# Altium PCB Combined.PcbDoc
Units mil, origin at the board's own origin, x right, y up, seen from the top; angles counter-clockwise.
Board outline 3937.01 x 3897.64 mil, 2 copper layers (Top Layer, Bottom Layer); 81 components, 26 nets, 218 pads, 48 vias.
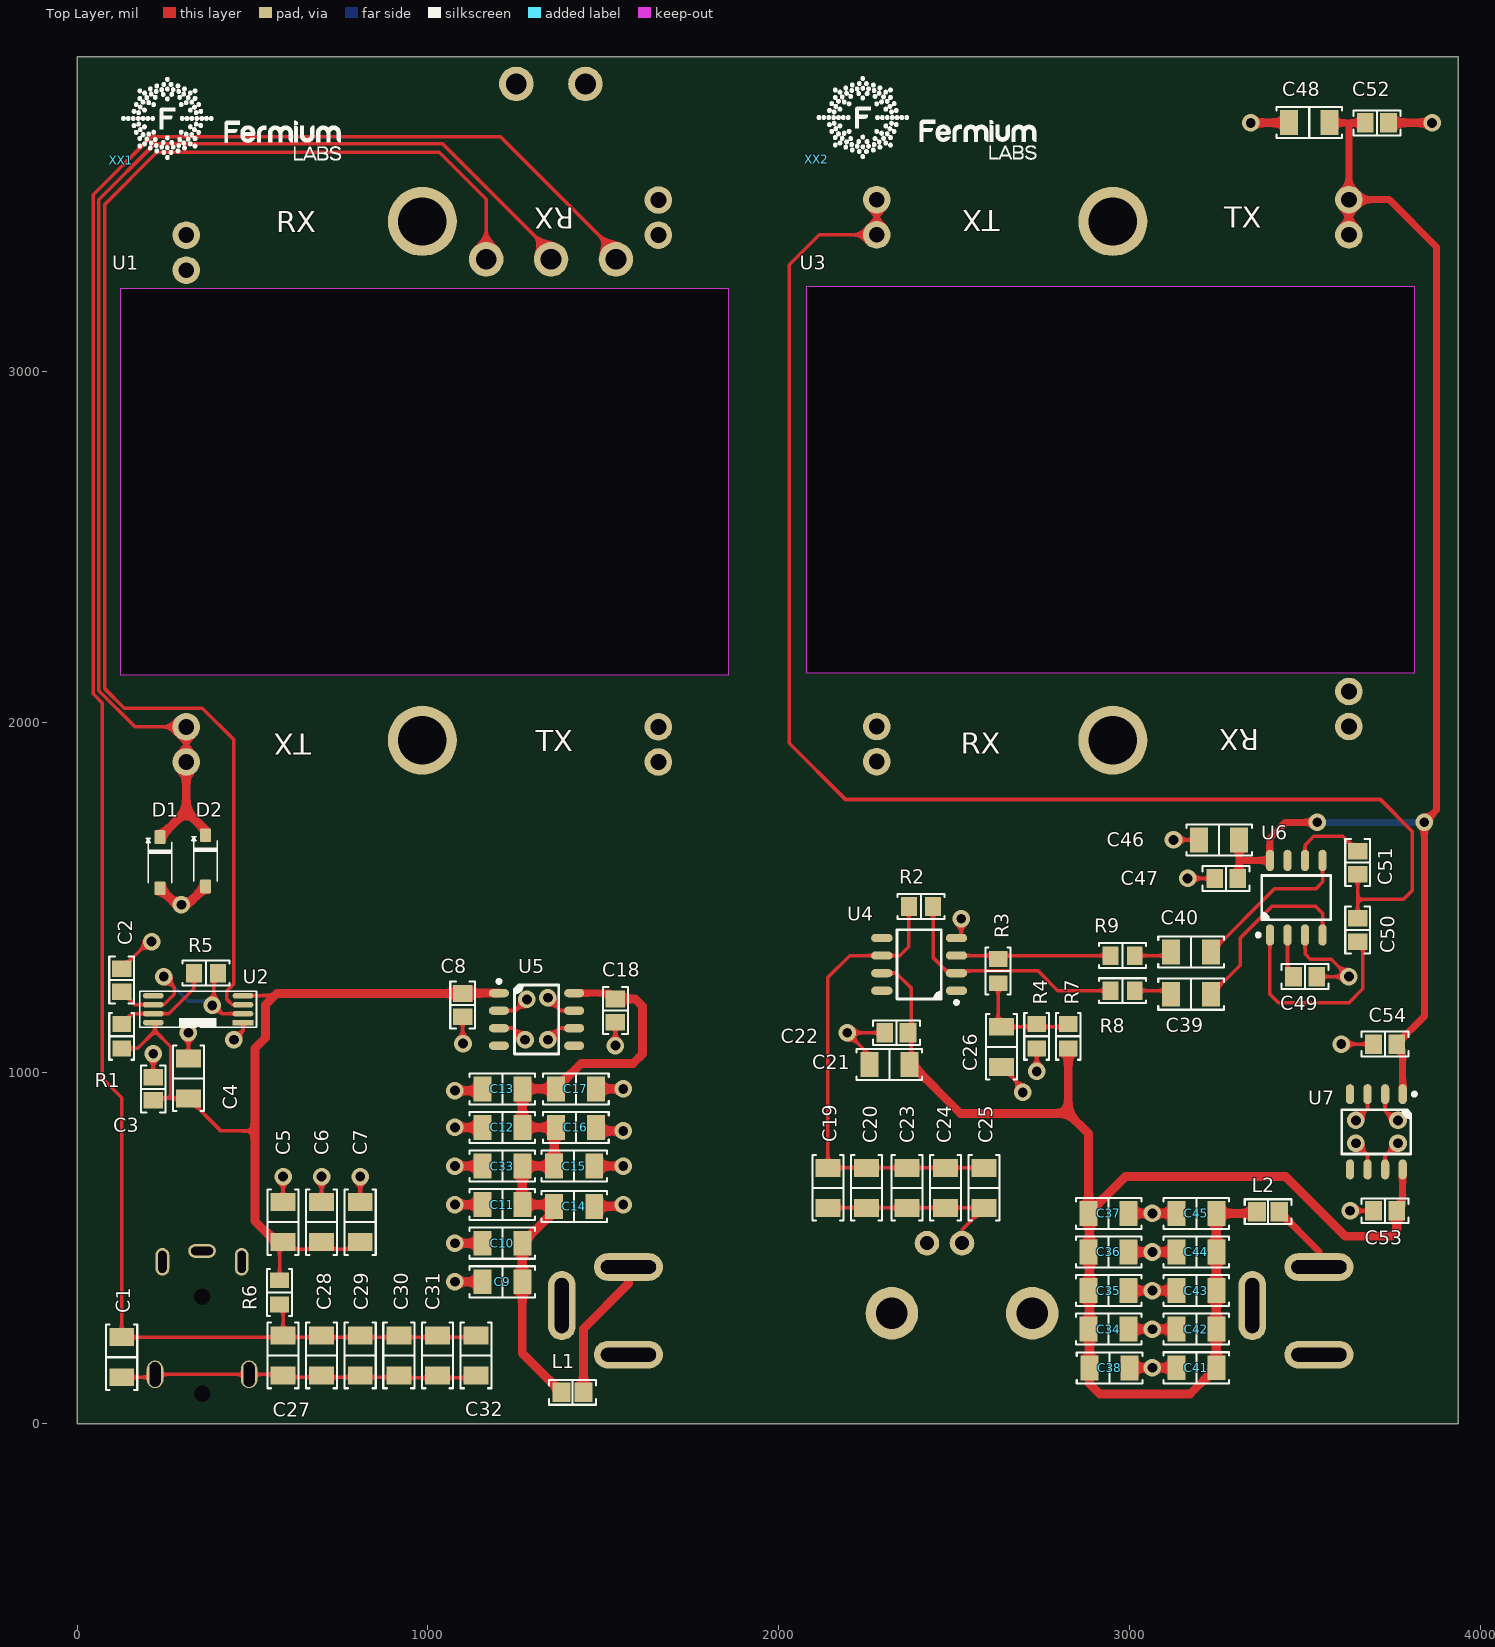
[diagram p0: Top Layer view]
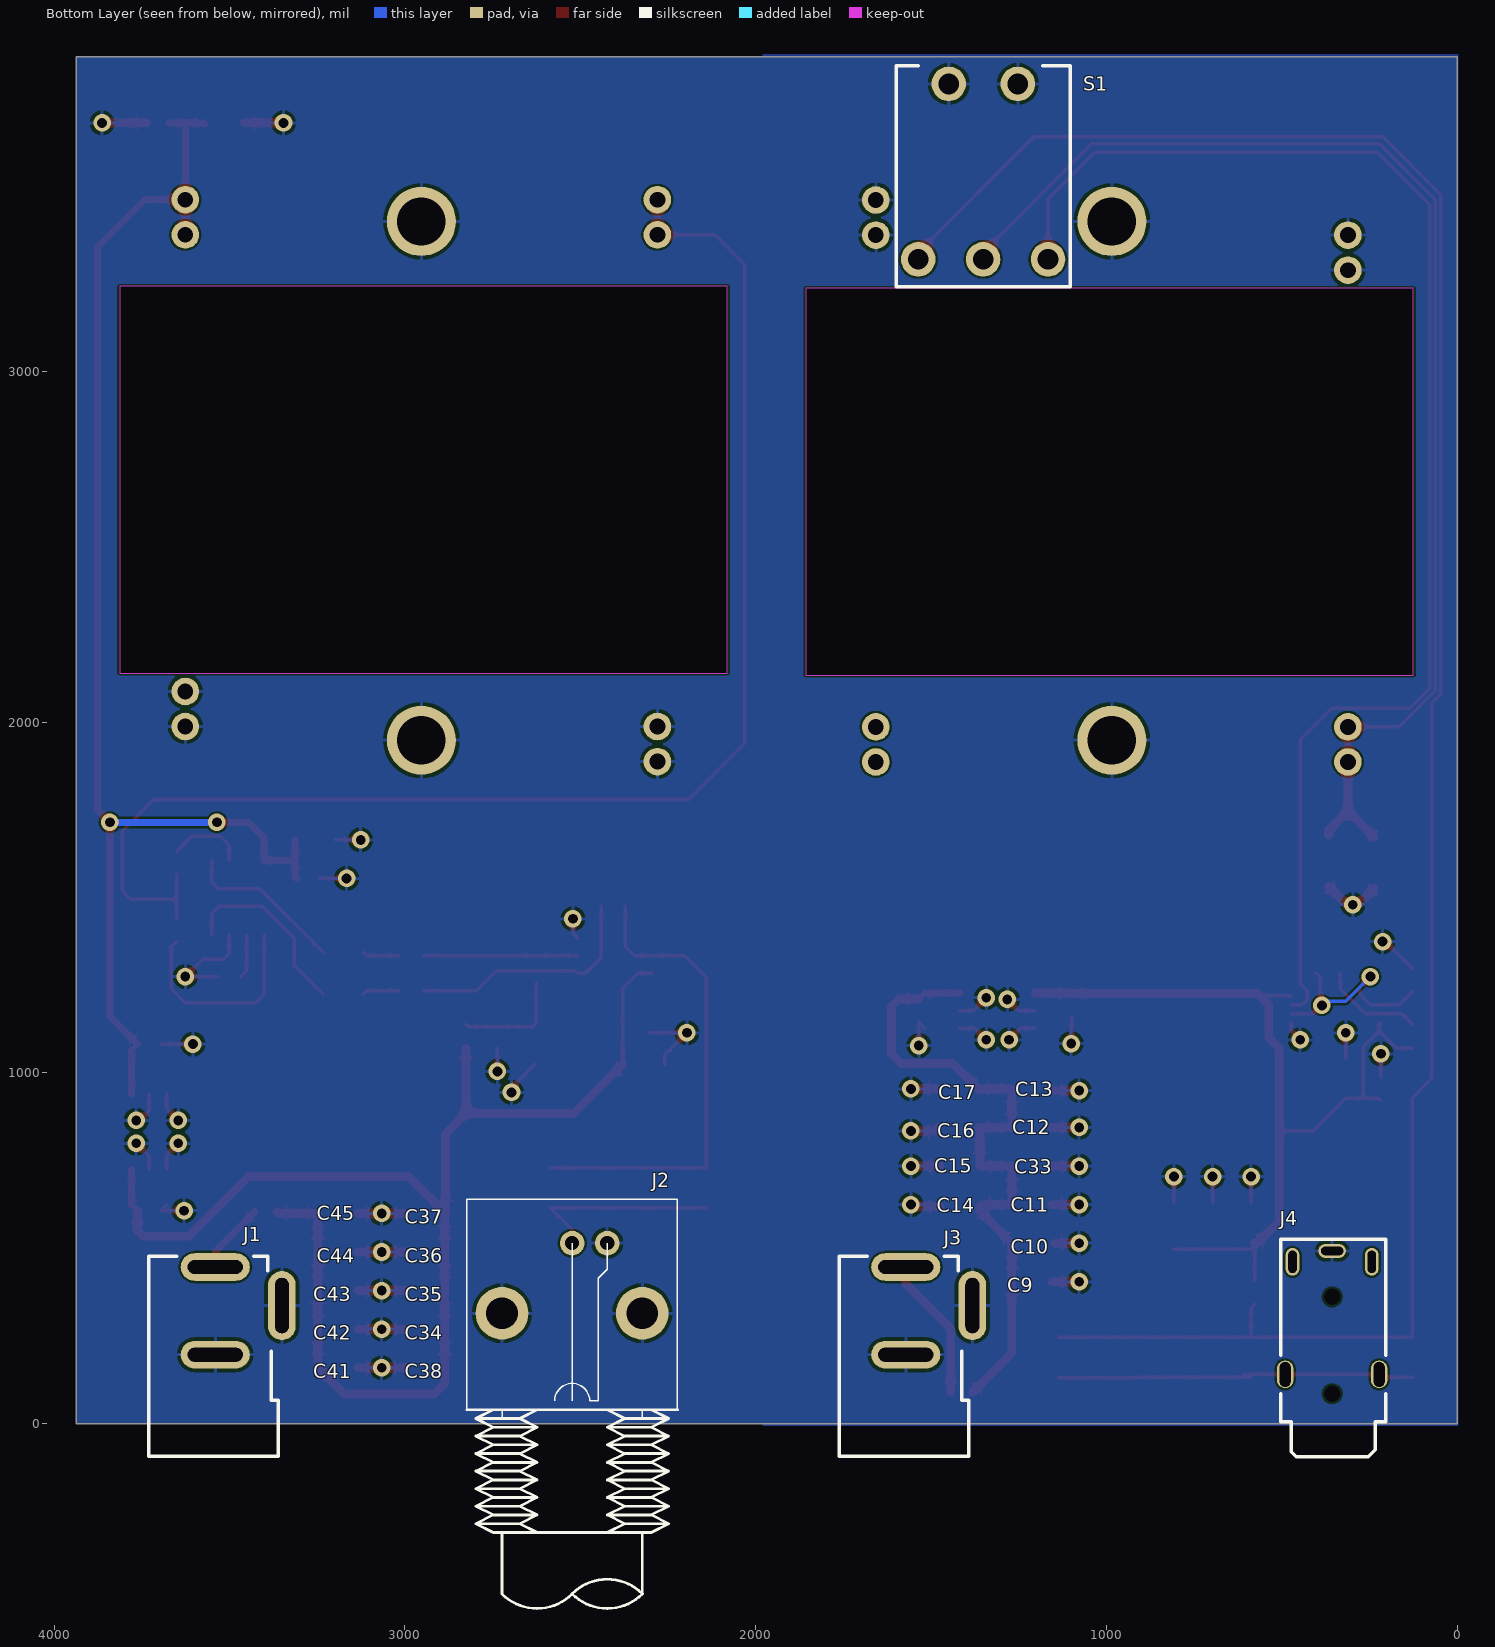
[diagram p1: Bottom Layer view, seen from below]
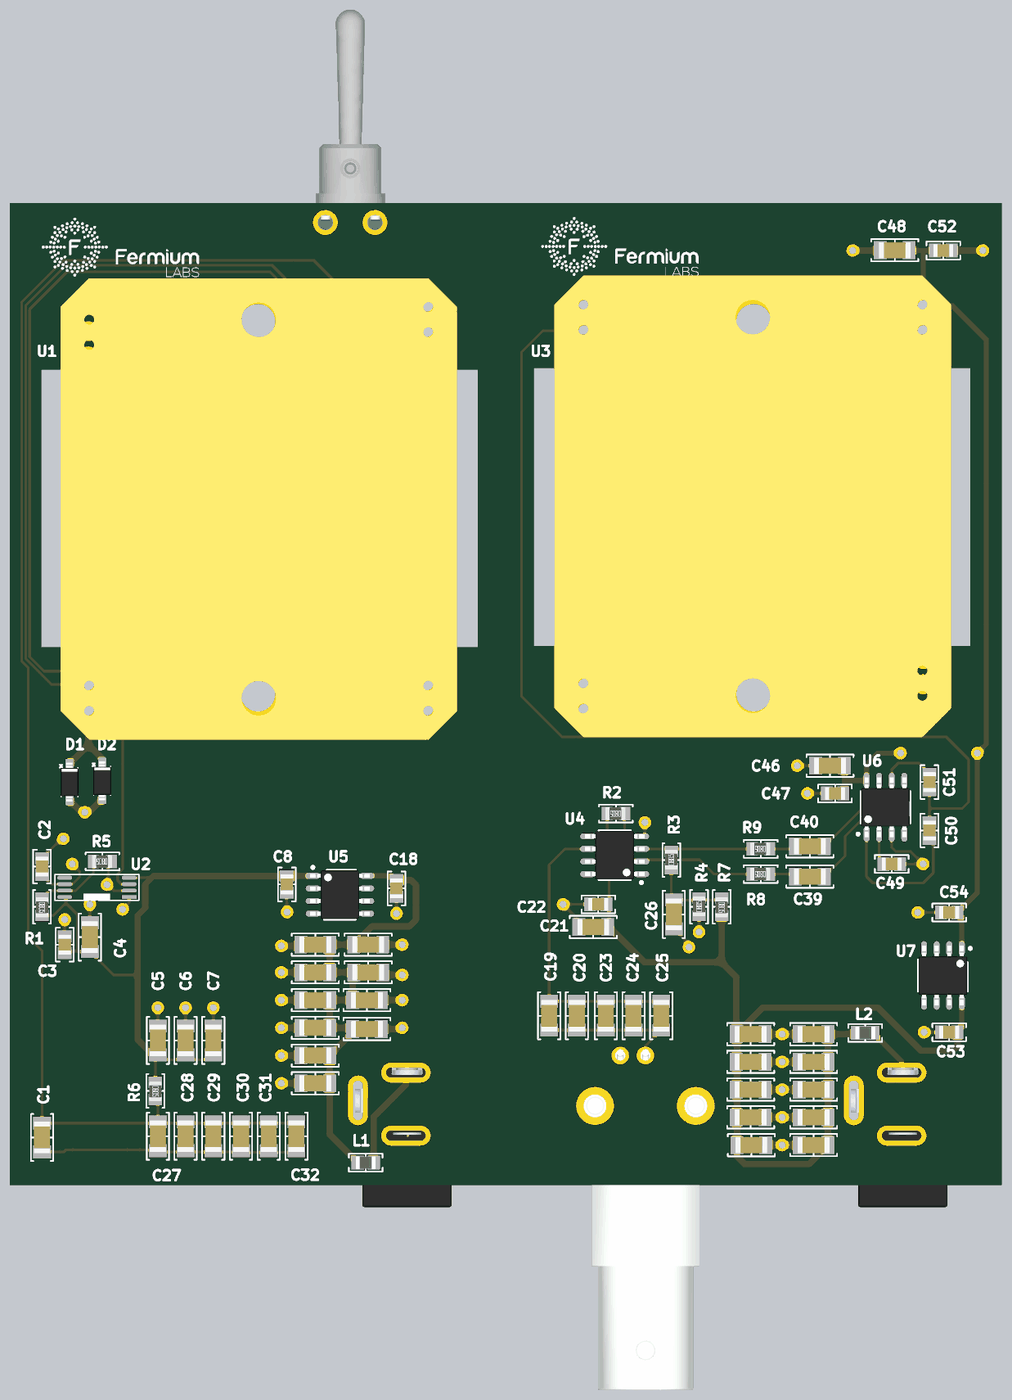
[diagram p2: 3D render of the assembled board from above, using the file's embedded part models]
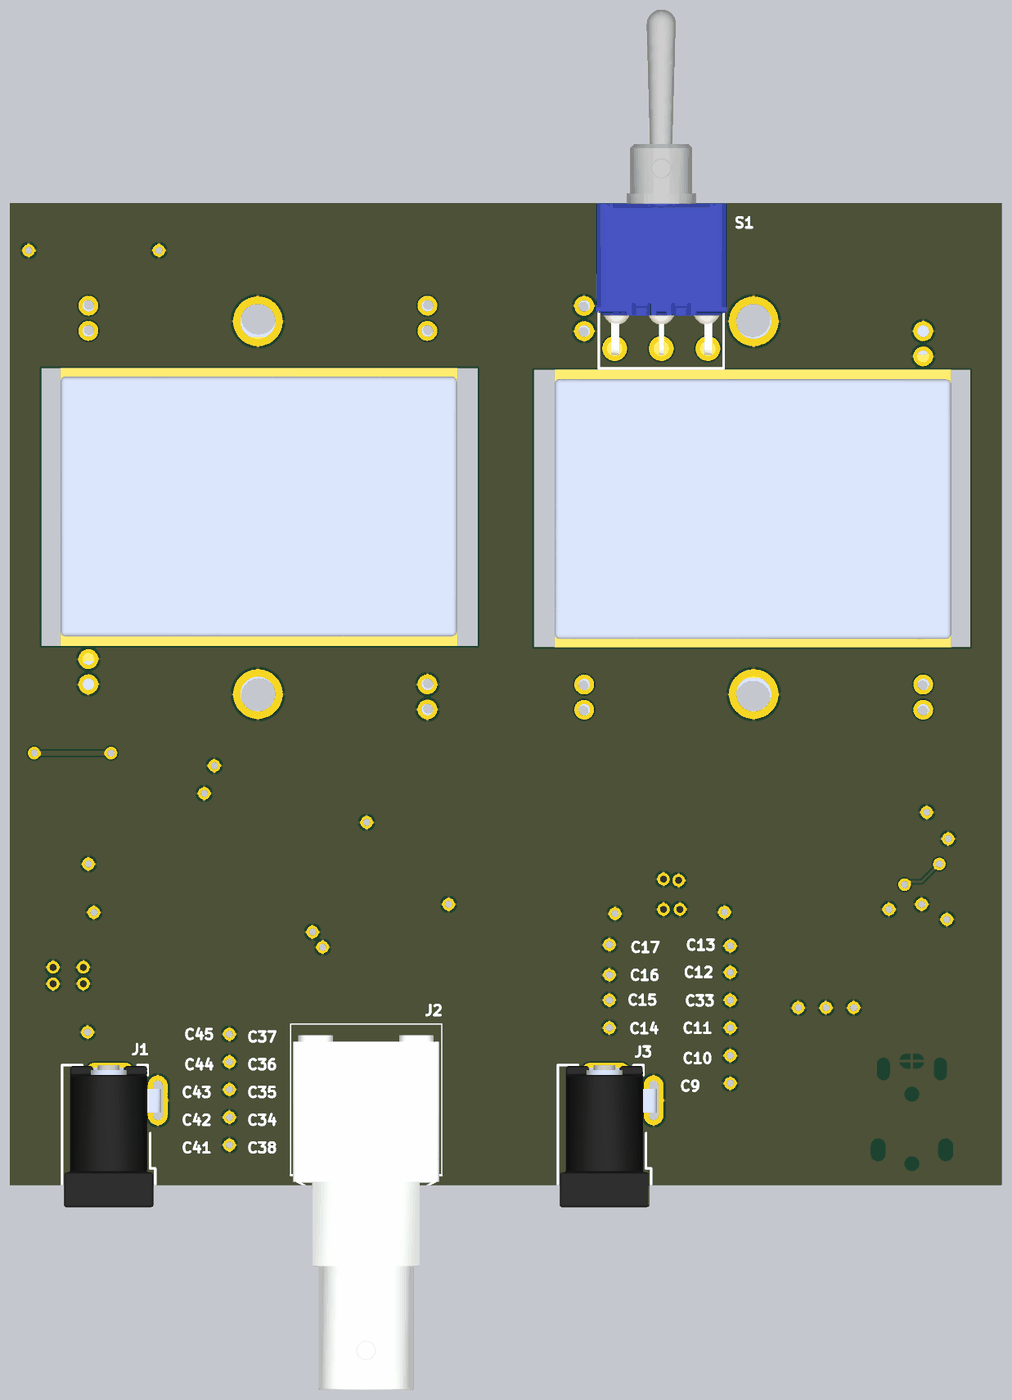
[diagram p3: 3D render of the assembled board from below, using the file's embedded part models]

## Layer stack, top to bottom
Top Solder: solder mask 0.4, Solder Resist, Dk 3.5
Top Layer: signal copper 1.4
Dielectric 1: dielectric 12.6, FR-4, Dk 4.8
Bottom Layer: signal copper 1.4
Bottom Solder: solder mask 0.4, Solder Resist, Dk 3.5

## Board outline
0,0 0,3897.64 1968.5,3897.64 3937.01,3897.64 3937.01,0 1968.5,0

## Design rules (kind name [scope] priority, off if disabled: settings)
AssemblyTestpoint [All] p1: testpointundercomponent=TRUE minsize=40 maxsize=100 preferedsize=60 minholesize=0 maxholesize=40 preferedholesize=32 testpointgrid=100 usegrid=TRUE gridoriginx=2677.17 gridoriginy=1889.76 gridtolerance=0.01 allowsidetop=TRUE allowsidebottom=TRUE
Clearance [All] p1: gap=6 ignorepadtopadclearanceinfootprint=FALSE
FanoutControl Fanout_LCC [All] p1 off: bgadir=Out bgaviamode=Centered fanoutstyle=Auto fanoutdirection=Alternating viagrid=1 // Protel DXP Scope 1 Expression Was: IsLCC   Fanout_LCC (Default Rule)
FanoutControl Fanout_BGA [All] p2 off: bgadir=Out bgaviamode=Centered fanoutstyle=Auto fanoutdirection=Alternating viagrid=1 // Protel DXP Scope 1 Expression Was: IsBGA   Fanout_BGA (Default Rule)
FanoutControl Fanout_SOIC [All] p3 off: bgadir=Out bgaviamode=Centered fanoutstyle=Auto fanoutdirection=Alternating viagrid=1 // Protel DXP Scope 1 Expression Was: IsSOIC   Fanout_SOIC (Default Rule)
FanoutControl Fanout_Default [All] p4: bgadir=Out bgaviamode=Centered fanoutstyle=Auto fanoutdirection=Alternating viagrid=1 // Fanout_Default (Default Rule)
FanoutControl Fanout_Small [All] p5 off: bgadir=Out bgaviamode=Centered fanoutstyle=Auto fanoutdirection=Alternating viagrid=1 // Protel DXP Scope 1 Expression Was: (CompPinCount < 5)   Fanout_Small (Default Rule)
HoleSize [All] p1: absolutevalues=TRUE maxlimit=99999 minlimit=11.81 maxpercent=80.000 minpercent=20.000
MinimumSolderMaskSliver [All] p1 off: minsoldermaskwidth=10
PolygonConnect [All] p1: connectstyle=Relief reliefconductorwidth=10 reliefentries=4 polygonreliefangle="90 Angle" airgapwidth=10
RoutingVias [All] p1: holewidth=28 width=50 viastyle="Through Hole" minholewidth=28 minwidth=50 maxholewidth=28 maxwidth=50
SilkToSilkClearance [All] p1: silktosilkclearance=7.87
SilkToSolderMaskClearance [All] p1 off: minsilkscreentomaskgap=10 clearancetoexposedcopper=TRUE // Protel DXP Scope 1 Expression Was: IsPad
SolderMaskExpansion [All] p1: expansion=2
Width [All] p1: maxlimit=200 minlimit=6 preferedwidth=10
20 further rules are at their usual default settings.

## Classes and differential pairs
component class transmitter: C1 C2 C3 C4 C5 C6 C7 C8 C9 C10 C11 C12 C13 C14 C15 C16 C17 C18 C27 C28 C29 C30 C31 C32 C33 D1 D2 J3 J4 L1 R1 R5 R6 S1 U1 U2 U5 XX2
component class receiver: C19 C20 C21 C22 C23 C24 C25 C26 C34 C35 C36 C37 C38 C39 C40 C41 C42 C43 C44 C45 C46 C47 C48 C49 C50 C51 C52 C53 C54 J1 J2 L2 M1R R2 R3 R4 R7 R8 R9 U3 U4 U6 U7 XX1

## Components (designator, comment, footprint, x,y, rotation, side; value= is the part's Value field where it differs from the comment)
C1 "10uF 25V 1206" "CAP 1206_3216" 127.24,189.65 r270 top (schematic designator C17T)
C2 "100nF 0805" "CAP 0805_2012" 127.24,1264.65 r90 top (schematic designator C22T)
C3 "100nF 0805" "CAP 0805_2012" 217.24,954.65 r90 top (schematic designator C25T)
C4 "10uF 25V 1206" "CAP 1206_3216" 317.24,984.65 r90 top (schematic designator C24T)
C5 "10uF 25V 1206" "CAP 1206_3216" 587.24,574.65 r90 top (schematic designator C15T)
C6 "10uF 25V 1206" "CAP 1206_3216" 697.24,574.65 r90 top (schematic designator C14T)
C7 "10uF 25V 1206" "CAP 1206_3216" 807.24,574.65 r90 top (schematic designator C13T)
C8 "100nF 0805" "CAP 0805_2012" 1099.24,1193.65 r270 top (schematic designator C2T)
C9 "10uF 25V 1206" "CAP 1206_3216" 1212.24,404.65 r180 top (schematic designator C10T)
C10 "10uF 25V 1206" "CAP 1206_3216" 1212.24,514.65 r180 top (schematic designator C9T)
C11 "10uF 25V 1206" "CAP 1206_3216" 1212.24,624.65 r180 top (schematic designator C8T)
C12 "10uF 25V 1206" "CAP 1206_3216" 1212.24,844.65 r180 top (schematic designator C6T)
C13 "10uF 25V 1206" "CAP 1206_3216" 1212.24,954.65 r180 top (schematic designator C5T)
C14 "10uF 25V 1206" "CAP 1206_3216" 1417.24,619.65 r0 top (schematic designator C12T)
C15 "10uF 25V 1206" "CAP 1206_3216" 1417.24,734.65 r0 top (schematic designator C11T)
C16 "10uF 25V 1206" "CAP 1206_3216" 1422.24,844.65 r0 top (schematic designator C4T)
C17 "10uF 25V 1206" "CAP 1206_3216" 1422.24,954.65 r0 top (schematic designator C3T)
C18 "100nF 0805" "CAP 0805_2012" 1534.57,1177.91 r270 top (schematic designator C1T)
C19 "10uF 25V 1206" "CAP 1206_3216" 2140.75,672.56 r270 top (schematic designator C13R)
C20 "10uF 25V 1206" "CAP 1206_3216" 2250.75,672.56 r270 top (schematic designator C17R)
C21 "10uF 25V 1206" "CAP 1206_3216" 2315.75,1024.65 r180 top (schematic designator C28R)
C22 "100nF 0805" "CAP 0805_2012" 2335.75,1114.65 r180 top (schematic designator C29R)
C23 "10uF 25V 1206" "CAP 1206_3216" 2365.75,672.56 r270 top (schematic designator C14R)
C24 "10uF 25V 1206" "CAP 1206_3216" 2475.75,672.56 r270 top (schematic designator C22R)
C25 "10uF 25V 1206" "CAP 1206_3216" 2585.75,672.56 r270 top (schematic designator C20R)
C26 "10uF 25V 1206" "CAP 1206_3216" 2635.75,1074.65 r270 top (schematic designator C23R)
C27 "10uF 25V 1206" "CAP 1206_3216" 587.24,194.65 r270 top (schematic designator C16T)
C28 "10uF 25V 1206" "CAP 1206_3216" 697.24,194.65 r270 top (schematic designator C20T)
C29 "10uF 25V 1206" "CAP 1206_3216" 807.24,194.65 r270 top (schematic designator C19T)
C30 "10uF 25V 1206" "CAP 1206_3216" 917.24,194.65 r270 top (schematic designator C18T)
C31 "10uF 25V 1206" "CAP 1206_3216" 1027.24,194.65 r270 top (schematic designator C21T)
C32 "10uF 25V 1206" "CAP 1206_3216" 1137.24,194.65 r270 top (schematic designator C23T)
C33 "10uF 25V 1206" "CAP 1206_3216" 1212.24,734.65 r180 top (schematic designator C7T)
C34 "10uF 25V 1206" "CAP 1206_3216" 2940.75,269.65 r0 top (schematic designator C4R)
C35 "10uF 25V 1206" "CAP 1206_3216" 2940.75,379.65 r0 top (schematic designator C5R)
C36 "10uF 25V 1206" "CAP 1206_3216" 2940.75,489.65 r0 top (schematic designator C6R)
C37 "10uF 25V 1206" "CAP 1206_3216" 2940.75,599.65 r0 top (schematic designator C7R)
C38 "10uF 25V 1206" "CAP 1206_3216" 2943.39,159.09 r0 top (schematic designator C3R)
C39 "10uF 25V 1206" "CAP 1206_3216" 3175.75,1224.65 r180 top (schematic designator C15R)
C40 "10uF 25V 1206" "CAP 1206_3216" 3175.75,1344.65 r180 top (schematic designator C18R)
C41 "10uF 25V 1206" "CAP 1206_3216" 3190.75,159.65 r180 top (schematic designator C12R)
C42 "10uF 25V 1206" "CAP 1206_3216" 3190.75,269.65 r180 top (schematic designator C11R)
C43 "10uF 25V 1206" "CAP 1206_3216" 3190.75,379.65 r180 top (schematic designator C10R)
C44 "10uF 25V 1206" "CAP 1206_3216" 3190.75,489.65 r180 top (schematic designator C9R)
C45 "10uF 25V 1206" "CAP 1206_3216" 3190.75,599.65 r180 top (schematic designator C8R)
C46 "10uF 25V 1206" "CAP 1206_3216" 3255.75,1664.65 r180 top (schematic designator C26R)
C47 "100nF 0805" "CAP 0805_2012" 3275.75,1554.65 r180 top (schematic designator C27R)
C48 "10uF 25V 1206" "CAP 1206_3216" 3512.75,3709.65 r180 top (schematic designator C24R)
C49 "100nF 0805" "CAP 0805_2012" 3500.75,1274.65 r0 top (schematic designator C21R)
C50 "1nF 0805" "CAP 0805_2012" 3650.75,1407.65 r270 top (schematic designator C16R)
C51 "1nF 0805" "CAP 0805_2012" 3650.75,1599.65 r90 top (schematic designator C19R)
C52 "100nF 0805" "CAP 0805_2012" 3705.75,3708.65 r0 top (schematic designator C25R)
C53 "100nF 0805" "CAP 0805_2012" 3729.02,607.32 r180 top (schematic designator C1R)
C54 "100nF 0805" "CAP 0805_2012" 3729.02,1082.32 r180 top (schematic designator C2R)
D1 "5.6V" SOD123 236.24,1599.65 r270 top (schematic designator D1T)
D2 "MBR0520L" SOD123 366.24,1604.65 r270 top (schematic designator D2T)
J1 "DC-10A FC68148" dc-jack 3540.31,446.85 r270 bottom (schematic designator J1R)
J2 "1-1337543-0" BNC-RA 2722.83,314.96 r0 bottom (schematic designator J2R)
J3 "DC-10A FC68148" dc-jack 1571.8,446.85 r270 bottom (schematic designator J1T)
J4 "FC68125" FC68125 -196.76,-854.35 r90 bottom (schematic designator J2T)
L1 "BLM21AG102SN1D" "FER 0805_2012" 1412.24,89.65 r180 top (schematic designator L1T)
L2 "BLM21AG102SN1D" "FER 0805_2012" 3395.75,604.65 r180 top (schematic designator L1R)
R1 "1K 0805" "RES 0805_2012" 127.24,1104.65 r270 top (schematic designator R2T)
R2 "220K 0805" "RES 0805_2012" 2405.75,1474.65 r180 top (schematic designator R1R)
R3 "220K 0805" "RES 0805_2012" 2625.75,1290.2 r90 top (schematic designator R5R)
R4 "1K 0805" "RES 0805_2012" 2735.75,1104.65 r90 top (schematic designator R6R)
R5 "10K 0805" "RES 0805_2012" 367.24,1284.65 r180 top (schematic designator R3T)
R6 "33R 0805" "RES 0805_2012" 577.24,374.65 r270 top (schematic designator R1T)
R7 "1K 0805" "RES 0805_2012" 2825.75,1104.65 r270 top (schematic designator R4R)
R8 "10K 0805" "RES 0805_2012" 2980.75,1234.65 r180 top (schematic designator R2R)
R9 "10K 0805" "RES 0805_2012" 2980.75,1334.65 r180 top (schematic designator R3R)
S1 "TSM102C3" TSM102C3 1536.24,3319.65 r180 bottom (schematic designator S1T)
U1 "HB100" HB100-buried 1657.24,1886.65 r90 top (schematic designator U2T)
U2 "NE555PWR" TSSOP8 473.15,1143.46 r180 top (schematic designator U3T)
U3 "HB100" HB100-buried 2279.75,3489.65 r270 top (schematic designator U4R)
U4 "LF356M/NOPB" "TI SOIC-8 D" 2400.75,1309.65 r180 top (schematic designator U3R)
U5 "L78L06ACD" "ST SOIC-8N" 1309.96,1152.65 r0 top (schematic designator U1T)
U6 "SA612A" "TI SOIC-8 D" 3475.75,1499.65 r90 top (schematic designator U2R)
U7 "L78L05ACD" "ST SOIC-8N" 3704.02,832.32 r270 top (schematic designator U1R)
XX1 "FermiumLABS Logo" frm-med 125.62,3602.12 r0 top (schematic designator XX1R)
XX2 "FermiumLABS Logo" frm-med 2108.19,3604.65 r0 top (schematic designator XX1T)

## Footprints (in the part's own frame and the unit in brackets; to place one, negate y for a bottom-side part, rotate by r counter-clockwise, add the part's x,y. Pads: shape width x height; smd on the part's side, far side on the other; paste and mask are expansions set on the pad)
BNC-RA [mil]
  round 70 hole 40: 1(-200,-200) 2(-300,-200)
  round 150 hole 90: A(0,0) B(-400,0)
  silkscreen extent -500,-325 100,842, body extent -490,-280 91,1127, height 619
"CAP 0805_2012" [mm]
  rect 1.2x1.4 smd: 1(-0.838,0) 2(0.838,0)
  silkscreen extent -1.7,-0.9 1.7,0.9, body extent -1,-0.64 1,0.64, height 1.26
"CAP 1206_3216" [mm]
  rect 1.3x1.8 smd: 1(-1.45,0) 2(1.45,0)
  silkscreen extent -2.37,-1.12 2.37,1.12, body extent -1.6,-0.81 1.6,0.81, height 1.62
dc-jack [mm]
  oval 2x5 hole 1 slot 4 at 90 deg: 1(0,0) 3(6.35,0)
  oval 5x2 hole 1 slot 4 at 0 deg: 2(2.794,4.826)
  silkscreen extent -0.76,-4.83 13.72,4.57, body extent -0.76,-4.62 13.54,5.13, height 11.3
FC68125 [mm]
  oval 1x2 hole 0.6 slot 1.6 at 90 deg: 1(34.214,14.046)
  oval 2x1 hole 0.6 slot 1.6 at 0 deg: 2(33.426,16.916) 6(33.426,11.176)
  oval 2x1.2 hole 0.8 slot 1.8 at 0 deg: 3(25.273,10.643) 3(25.273,17.45)
  round 0 hole 1.2: ""(23.876,14.046) ""(30.886,14.046)
  silkscreen extent 19.3,10.16 35.05,17.78, body extent 19.37,10.31 34.47,17.71, height 6.2
"FER 0805_2012" [mm]
  rect 1.3x1.4 smd: 1(-0.8,0) 2(0.8,0)
  silkscreen extent -1.7,-0.9 1.7,0.9, body extent -1,-0.64 1,0.64, height 1.26
frm-med [mil]
  silkscreen extent 1,1 626,237
HB100-buried [mm]
  round 2 hole 1.143: 1(0,34.188) 1(2.54,34.188) 2(0,0) 2(2.54,0) 3(38.151,0) 3(40.691,0) 4(35.611,34.188) 4(38.151,34.188)
  round 5 hole 3.5: 5(1.575,17.094) 5(39.141,17.094)
  Keep-Out Layer board cut-out: 6.286,-5.066 6.286,38.934 34.286,38.934 34.286,-5.066
  body extent -3.02,-3 43.48,37, height 3
"RES 0805_2012" [mm]
  rect 1.15x1.35 smd: 1(-0.875,0) 2(0.875,0)
  silkscreen extent -1.7,-0.9 1.7,0.9, body extent -0.95,-0.62 1.05,0.63, height 0.6
SOD123 [mm]
  round 0.508 on Mech15: 0(0,0)
  rrect25% 1x0.8 smd: A(1.85,0) K(-1.85,0)
  silkscreen extent -1.75,-1 1.45,0.85, body extent -1.95,-0.9 1.95,0.9, height 1.18
"ST SOIC-8N" [mm]
  oval 1.45x0.6 smd: 1(-2.725,1.905) 2(-2.725,0.635) 3(-2.725,-0.635) 4(-2.725,-1.905) 5(2.725,-1.905) 6(2.725,-0.635) 7(2.725,0.635) 8(2.725,1.905)
  silkscreen extent -2.85,-2.5 1.6,2.88, body extent -3.01,-2.45 3.01,2.45, height 1.5
"TI SOIC-8 D" [mm]
  oval 1.55x0.6 smd: 1(-2.7,1.905) 2(-2.7,0.635) 3(-2.7,-0.635) 4(-2.7,-1.905) 5(2.7,-1.905) 6(2.7,-0.635) 7(2.7,0.635) 8(2.7,1.905)
  silkscreen extent -2.83,-2.5 1.6,2.88, body extent -3.01,-2.45 3.01,2.45, height 1.5
TSM102C3 [mm]
  round 2.5 hole 1.5: 1(0,0) 2(4.699,0) 3(9.398,0) G(2.21,12.7) G(7.214,12.7)
  silkscreen extent -1.6,-2 11,14, body extent -1.9,-0.65 11.3,34.15, height 8.47
TSSOP8 [mm]
  rect 1.5x0.4 smd: 1(0,0)
  oval 1.5x0.4 smd: 2(0,-0.65) 3(0,-1.3) 4(0,-1.95) 5(6.5,-1.95) 6(6.5,-1.3) 7(6.5,-0.65) 8(6.5,0)
  silkscreen extent -0.98,-2.28 7.48,0.33, body extent -0.06,-2.26 6.52,0.3, height 1.04

## Part data
C1 C4 C5 C6 C7 C9 C10 C11 C12 C13 C14 C15 C16 C17 C19 C20 C21 C23 C24 C25 C26 C27 C28 C29 C30 C31 C32 C33 C34 C35 C36 C37 C38 C39 C40 C41 C42 C43 C44 C45 C46 C48: library part C10uF, "Capacitor", Manufacturer=SAMSUNG, Manufacturer Part Number=CL31A106KAHNNNE, Part Number=C10uF
C2 C3 C8 C18 C22 C47 C49 C52 C53 C54: library part C100nF, "Capacitor", Manufacturer=YAGEO, Manufacturer Part Number=CC0805JRX7R9BB104, Part Number=C100nF
C50 C51: library part C1nF, "Capacitor", Manufacturer=Samsung, Manufacturer Part Number=CL21B102KCANNNC, Part Number=C1nF
D1: library part "D Zener", "Zener Diode", Manufacturer=Diodes, Manufacturer Part Number=BZT52C5V6-7-F, Part Number="D Zener"
D2: library part "D Schottky", "Schottky Diode", Manufacturer="FAIRCHILD SEMICONDUCTOR", Manufacturer Part Number=MBR0520L, Part Number="D Schottky"
J1 J3: library part jackdc, Manufacturer=CLIFF, Manufacturer Part Number="DC-10A FC68148", Part Number=jackdc
J2: library part BNC-PCB-RA, "connector bnc", Manufacturer="TE CONNECTIVITY", Manufacturer Part Number=1-1337543-0, Part Number=BNC-PCB-RA
J4: Manufacturer=CLIFF, Manufacturer Part Number=FC68125, Part Number=FC68125
L1 L2: library part "Inductor Iron", "Magnetic-Core Inductor", Manufacturer=Murata, Manufacturer Part Number=BLM21AG102SN1D, Part Number="Inductor Iron"
R1 R4 R7: library part R1K, "Resistor", Manufacturer="Royal Electronic Factory", Manufacturer Part Number=0805S8J0102T5E, Part Number=R1K
R2 R3: library part R220K, "Resistor", Manufacturer=Vishay, Manufacturer Part Number=CRCW0805220KFKEA, Part Number=R220K
R5 R8 R9: library part R10K, "Resistor", Manufacturer="Royal Electronic Factory", Manufacturer Part Number=0805S8J0103T5E, Part Number=R10K
R6: library part R33, "Resistor", Manufacturer=Vishay, Manufacturer Part Number=CRCW080533R0JNTABC, Part Number=R33
S1: Manufacturer Part Number=Ninigi, Manufacturer=TSM102C3, Part Number=TSM102C3
U1 U3: Manufacturer="China unspecified", Manufacturer Part Number=HB100, Part Number=HB100
U2: Manufacturer="Texas Instruments", Manufacturer Part Number=NE555PWR, Part Number=NE555PWR
U4: library part LF358, Manufacturer="Texas Instruments", Manufacturer Part Number=LF356M/NOPB, Part Number=LF358
U5 U7: Manufacturer="ST Microelectronics"
  U5: Manufacturer Part Number=L78L06ACD, Part Number=L78L06ACD
  U7: Manufacturer Part Number=L78L05ACD, Part Number=L78L05ACD
U6: Manufacturer=NXP, Manufacturer Part Number=SA612AD, Supplier 1=TME, Supplier 2=Mouser, Supplier Part Number 1=SA612AD, Supplier Part Number 2=771-SA612AD01112
XX1 XX2: library part fermiumlabs-logo, Part Number=fermiumlabs-logo

## Via types
v1: diameter 50, hole 28, Top Layer to Bottom Layer, 48 vias

## Nets (pads, with @x,y where several pads share a name; then routed paths per layer and width w, separated by ;. In a path a pad name is that pad's centre, name@x,y a point inside that pad or via, vN(x,y) a via of type N, cw(c..) or ccw(c..) an arc to the next point about the centre after c; other vN are vias at no path point)
5V: C46.1 C47.1 C48.1 C52.1 C54.1 U3.1 U6.8 U7.1 | length 3913.9
  Top Layer w10: C54.1 C54.1@3779.02,1065.32
  Top Layer w20: C47.1 3312.83,1558.73 3312.83,1604.65 ; C46.1 3312.83,1604.65 ; v1(3535.75,1714.65) 3445.75,1714.65 3400.75,1669.65 U6.8 3314.13,1605.95 3312.83,1604.65 ; C48.1@3569.76,3705.57 3572.83,3708.65 C52.1 ; U3.1@3625.75,3389.65 U3.1@3625.75,3489.65 ; 3625.75,3701.65 U3.1@3625.75,3489.65 ; C54.1 3840.75,1161.06 v1(3840.75,1714.65) 3875.75,1749.65 3875.75,3354.65 3740.75,3489.65 U3.1@3625.75,3489.65 ; U7.1 C54.1@3779.02,1065.32
  Bottom Layer w20: v1(3535.75,1714.65) v1(3840.75,1714.65)
12V: C21.1 C22.1 C34.1 C35.1 C36.1 C37.1 C38.1 C41.1 C42.1 C43.1 C44.1 C45.1 C53.1 L2.2 R7.2 U4.7 U7.8 | length 3948.8
  Top Layer w10: U4.7 2335.75,1284.65 2378.66,1241.73 C21.1@2378.66,1024.65 ; C53.1 C53.1@3779.02,624.32
  Top Layer w20: C53.1@3779.02,624.32 U7.8
  Top Layer w25: C21.1@2378.66,1024.65 2518.66,884.65 2825.75,884.65 ; R7.2 2825.75,884.65 ; L2.2 3359.25,599.65 C45.1 C44.1 C43.1 C42.1 C41.1 3172.83,84.65 2915.75,84.65 2886.3,114.09 C38.1 2886.3,379.65 2886.3,597.01 C37.1 ; C53.1 3762.02,550.91 3745.75,534.65 3615.75,534.65 3445.75,704.65 2988.66,704.65 C37.1 ; 2825.75,884.65 2883.66,826.73 C37.1
GND: C2.2 C3.2 C4.2 C5.2 C6.2 C7.2 C8.2 C9.2 C10.2 C11.2 C12.2 C13.2 C14.2 C15.2 C16.2 C17.2 C18.2 C21.2 C22.2 C26.2 C33.2 C34.2 C35.2 C36.2 C37.2 C38.2 C41.2 C42.2 C43.2 C44.2 C45.2 C46.2 C47.2 C48.2 C49.2 C52.2 C53.2 C54.2 D1.A D2.A J1.2 J1.3 J2.2 J2.A J2.B J3.2 J3.3 J4.1 R4.1 S1.G U1.3 U1.4 U1.5 U2.1 U3.3 U3.4 U3.5 U4.4 U5.2 U5.3 U5.6 U5.7 U6.3 U7.2 U7.3 U7.6 U7.7 | length 4330.7
  Top Layer w10: C2.2 204.24,1374.65 v1(212.24,1374.65) ; C3.2 v1(217.24,1054.65) ; C4.2 v1(317.24,1114.65) ; v1(447.24,1094.65) 473.15,1120.55 U2.1 ; C5.2 v1@587.24,694.65 ; C6.2 v1@697.24,684.65 ; C7.2 v1@807.24,694.65 ; C8.2 1099.24,1084.65 v1(1100.24,1083.65) ; U5.3 1244.24,1127.65 v1(1277.24,1094.65) ; U5.2 1250.24,1177.65 v1(1282.24,1209.65) ; v1(1342.24,1094.65) 1375.24,1127.65 U5.6 ; v1(1342.24,1214.65) 1379.24,1177.65 U5.7 ; C18.2@1517.57,1127.91 C18.2 v1(1534.57,1077.91) ; C21.2 2258.66,1051.73 v1(2195.75,1114.65) C22.2 ; U4.4 2520.75,1398.35 v1(2520.75,1439.65) ; C26.2@2628.66,1024.65 C26.2 2695.75,957.56 v1(2695.75,944.65) ; v1(2735.75,1004.65) R4.1 ; v1(3125.75,1664.65) C46.2 ; v1(3165.75,1554.65) C47.2 ; U6.3 3500.75,1339.65 3515.75,1324.65 3575.75,1324.65 v1(3625.75,1274.65) ; C49.2 v1@3600.75,1274.65 ; v1(3604.02,1082.32) C54.2 ; v1(3629.02,607.32) C53.2 C53.2@3679.02,624.32 ; v1(3645.75,799.65) 3679.02,766.38 U7.6 ; v1(3645.75,864.65) 3679.02,897.91 U7.3 ; U7.7 3729.02,762.91 v1(3765.75,799.65) ; U7.2 3729.02,891.38 3755.75,864.65 v1(3765.75,864.65)
  Top Layer w25: D1.A 283.41,1479.65 v1(297.24,1479.65) 314.08,1479.65 D2.A ; v1(1077.24,404.65) C9.2 ; v1(1077.24,514.65) C10.2@1147.24,514.65 ; v1(1077.24,624.65) C11.2 ; v1(1077.24,734.65) C33.2 ; v1(1077.24,844.65) C12.2 ; v1(1077.24,949.65) 1150.16,949.65 C13.2 ; C14.2 1552.24,619.65 v1(1557.24,624.65) ; C15.2 v1(1557.24,734.65) ; C16.2 1489.33,834.65 v1(1557.24,834.65) ; C17.2 v1(1557.24,954.65) ; J2.A J2.A@2723.15,314.65 ; C38.2@2997.83,161.73 C38.2 3001.02,159.65 v1(3065.75,159.65) C41.2 ; C34.2 v1(3065.75,269.65) C42.2 ; C35.2 v1(3065.75,379.65) C43.2 ; C36.2 v1(3065.75,489.65) C44.2 ; C37.2 v1(3065.75,599.65) C45.2 ; v1(3345.75,3708.65) C48.2@3458.66,3708.65 ; C52.2@3735.75,3708.65 C52.2 v1(3862.75,3708.65)
  other v1: 587.24,704.65 697.24,704.65 807.24,704.65
NetC1_1: C1.1 C27.1 C28.1 C29.1 C30.1 C31.1 C32.1 R6.2 S1.1 | length 6114.4
  Top Layer w10: R6.2 587.24,330.2 C27.1 C27.1@587.24,246.73 ; C32.1@1137.24,244.65 1135.16,246.73 C27.1@587.24,246.73 ; S1.1 1536.24,3339.65 1206.24,3669.65 212.24,3669.65 46.24,3503.65 46.24,2080.65 72.24,2054.65 72.24,984.65 127.24,929.65 C1.1 C27.1@587.24,246.73
NetC1_2: C1.2 C27.2 C28.2 C29.2 C30.2 C31.2 C32.2 J4.3 | length 1047
  Top Layer w10: C1.2 214.16,132.56 222.24,140.65 490.24,140.65 C27.2@595.33,140.65 ; C27.2@608.24,141.56 607.33,140.65 C27.2@595.33,140.65 ; C32.2@1137.24,130.47 1027.24,130.47 909.33,130.47 907.24,132.56 807.24,132.56 697.24,132.56 587.24,132.56 C27.2@595.33,140.65
NetC2_1: C2.1 R5.1 U2.2 U2.6 | length 602.1
  Top Layer w10: C2.1 164.24,1194.65 U2.6 247.24,1194.65 277.24,1224.65 277.24,1244.65 v1(247.24,1274.65) ; R5.1 390.24,1273.2 390.24,1191.65 412.83,1169.06 U2.2
  Bottom Layer w10: v1(247.24,1274.65) 317.74,1204.15 373.74,1204.15 v1(385.24,1192.65)
NetC9_1: C9.1 C10.1 C11.1 C12.1 C13.1 C14.1 C15.1 C16.1 C17.1 C18.1 C33.1 L1.2 U5.8 | length 1956
  Top Layer w10: C18.1@1517.57,1227.91 C18.1
  Top Layer w20: U5.8@1416.85,1227.91 C18.1@1517.57,1227.91
  Top Layer w25: L1.2 1269.33,201.06 C9.1 C10.1 1360.16,605.47 C14.1 1355.16,624.65 C11.1 C33.1 C15.1 1360.16,839.65 C16.1 C12.1 C13.1 C17.1 1437.66,1027.15 1584.74,1027.15 1612.24,1054.65 1612.24,1189.65 1590.98,1210.91 C18.1
NetC19_1: C19.1 C20.1 C23.1 C24.1 C25.1 R2.2 U4.6 | length 1369.3
  Top Layer w10: R2.2 2371.3,1360.2 2345.75,1334.65 U4.6 2202.75,1334.65 2140.75,1272.65 C19.1 C20.1 C23.1 C24.1 C25.1
NetC19_2: C19.2 C20.2 C23.2 C24.2 C25.2 J2.1 | length 571.6
  Top Layer w10: C19.2 C20.2 C23.2 C24.2 C25.2 2522.83,552.56 J2.1
NetC26_1: C26.1 R3.1 R4.2 R7.1 | length 321.2
  Top Layer w10: R3.1 2625.75,1141.73 C26.1 2818.39,1131.73 R7.1
NetC39_1: C39.1 U6.4 | length 536.2
  Top Layer w10: C39.1 3315.75,1307.56 3315.75,1384.65 3405.75,1474.65 3530.75,1474.65 3550.75,1454.65 U6.4
NetC39_2: C39.2 R8.1 | length 107.6
  Top Layer w10: R8.1 3108.66,1234.65 C39.2
NetC40_1: C40.1 U6.5 | length 462.1
  Top Layer w10: C40.1 3412.83,1524.65 3530.75,1524.65 3550.75,1544.65 U6.5
NetC40_2: C40.2 R9.1 | length 107.6
  Top Layer w10: R9.1 3108.66,1334.65 C40.2
NetC49_1: C49.1 U6.2 | length 125.7
  Top Layer w10: U6.2 3450.75,1291.65 C49.1
NetC50_1: C50.1 C51.1 U3.2 | length 4089.1
  Top Layer w10: U3.2@2279.75,3489.65 2279.75,3389.65 2115.75,3389.65 2030.75,3304.65 2030.75,1939.65 2190.75,1779.65 3715.75,1779.65 3805.75,1689.65 3805.75,1519.65 3780.75,1494.65 3650.75,1494.65 ; C50.1 3650.75,1494.65 ; C51.1 3650.75,1494.65
NetC50_2: C50.2 U6.1 | length 601.8
  Top Layer w10: U6.1 3400.75,1224.65 3425.75,1199.65 3625.75,1199.65 3665.75,1239.65 3665.75,1359.65 C50.2
NetC51_2: C51.2 U6.6 | length 221.5
  Top Layer w10: U6.6 3500.75,1649.65 3525.75,1674.65 3608.75,1674.65 C51.2
NetD1_K: D1.K D2.K S1.2 U1.1 | length 3633.4
  Top Layer w10: U1.1@311.24,1886.65 311.24,1986.65 165.24,1986.65 62.24,2089.65 62.24,3489.65 222.24,3649.65 1041.24,3649.65 1351.24,3339.65 S1.2
  Top Layer w25: D1.K 311.24,1747.48 ; U1.1@311.24,1886.65 311.24,1747.48 ; D2.K 366.24,1692.48 311.24,1747.48
NetJ1_1: J1.1 L2.1 | length 204.6
  Top Layer w20: L2.1 3540.31,491.58 J1.1
NetJ3_1: J3.1 L1.1 | length 410.3
  Top Layer w25: L1.1 1443.74,271.14 1571.8,399.2 J3.1
NetR1_1: R1.1 R5.2 U2.7 | length 291.9
  Top Layer w10: R1.1 157.2,1169.06 U2.7 261.65,1169.06 332.8,1240.2 R5.2
NetR2_1: R2.1 R8.2 U4.2 | length 695.9
  Top Layer w10: R2.1 2440.2,1329.29 2484.84,1284.65 U4.2 2513.41,1291.01 2739.39,1291.01 2795.75,1234.65 R8.2
NetR3_2: R3.2 R9.2 U4.3 | length 439.3
  Top Layer w10: U4.3 R9.2
NetS1_3: S1.3 U2.3 | length 3985.7
  Top Layer w10: U2.3 442.24,1194.65 427.24,1209.65 427.24,1234.65 447.24,1254.65 447.24,1949.65 357.24,2039.65 134.87,2039.65 78.24,2096.27 78.24,3475.65 227.24,3624.65 1032.24,3624.65 1166.24,3490.65 S1.3
VCC: C3.1 C4.1 C5.1 C6.1 C7.1 C8.1 R1.2 R6.1 U2.4 U2.8 U5.1 | length 2505.9
  Top Layer w10: R1.2 172.8,1070.2 222.24,1119.65 ; C3.1 223.16,927.56 267.24,927.56 ; U2.8 222.24,1138.46 222.24,1119.65 ; U2.4 562.83,1220.24 ; 507.24,834.65 410.16,834.65 C4.1 267.24,927.56 ; R6.1 C5.1@577.24,514.65 ; C5.1@587.24,497.56 C7.1@807.24,497.56 ; 222.24,1119.65 267.24,1074.65 267.24,927.56
  Top Layer w25: C5.1@577.24,514.65 573.7,511.1 507.24,577.56 507.24,834.65 507.24,1070.5 537.18,1100.43 537.18,1194.58 562.83,1220.24 569.24,1226.65 C8.1 1100.24,1227.65 U5.1
pads on no net: D1.0 D2.0 J4. J4.2 J4.6 U1.2 U2.5 U4.1 U4.5 U4.8 U5.4 U5.5 U6.7 U7.4 U7.5

## Polygon pours and split planes (outlines as drawn)
GND on Bottom Layer "Bottom Layer-No Net" (solid, pour order 8): 1950,0 3937.01,0 3937.01,3897.64 1950,3897.64
GND on Bottom Layer "Bottom Layer-GND" (solid, pour order 6): -2.76,-5.35 1980,-5.35 1980,3904.65 -2.76,3904.65

## Silkscreen, mask and mechanical layers (free items; w line width, h text height)
Mechanical 1:
  lines w10: 1968.5,-108.78 1968.5,4094.49 ; 2047.24,4370.08 2007.87,4370.08 1968.5,4330.71 1968.5,4212.6 ; 1968.5,4212.6 1968.5,4212.6 ; 1968.5,4212.6 2007.87,4251.97 1929.13,4251.97 1968.5,4212.6 ; 1968.5,4212.6 1968.5,4212.6 ; 0,0 1968.5,0 3937.01,0 3937.01,3897.64 1968.5,3897.64 0,3897.64 0,0 ; 114.4,2144.3 114.4,3246.66 1846.69,3246.66 1846.69,2144.3 114.4,2144.3 ; 2082.91,2144.3 2082.91,3246.66 3815.19,3246.66 3815.19,2144.3 2082.91,2144.3
  text "V-ROUTE" at 2086.61,4370.08 h60

## Text inside footprints (layer, text, board x,y; h text height)
U1: Top Overlay "RX" at 1417.24,3466.65 h60 r180; Top Overlay "TX" at 667.24,1966.65 h60 r180; Top Overlay "TX" at 1307.24,1916.65 h60; Top Overlay "RX" at 567.24,3396.65 h60; Mechanical 1 "## CUT CUT CUT ## / ## CUT CUT CUT ## / ## CUT CUT CUT ## / ## CUT CUT CUT ## / ## CUT CUT CUT ## / ## CUT CUT CUT ## / ## CUT CUT CUT ## / ## CUT CUT CUT ## / ## CUT CUT CUT ## / ## CUT CUT CUT ## / ## CUT CUT CUT ## / ## CUT CUT CUT ## / ## CUT CUT CUT ## / ## CUT CUT CUT ## / ## CUT CUT CUT ## / ## CUT CUT CUT ## / ## CUT CUT CUT ## / ## CUT CUT CUT ##" at 1847.24,2176.65 h60 r90
U3: Top Overlay "RX" at 2519.75,1909.65 h60; Top Overlay "TX" at 3269.75,3409.65 h60; Top Overlay "TX" at 2629.75,3459.65 h60 r180; Top Overlay "RX" at 3369.75,1979.65 h60 r180; Mechanical 1 "## CUT CUT CUT ## / ## CUT CUT CUT ## / ## CUT CUT CUT ## / ## CUT CUT CUT ## / ## CUT CUT CUT ## / ## CUT CUT CUT ## / ## CUT CUT CUT ## / ## CUT CUT CUT ## / ## CUT CUT CUT ## / ## CUT CUT CUT ## / ## CUT CUT CUT ## / ## CUT CUT CUT ## / ## CUT CUT CUT ## / ## CUT CUT CUT ## / ## CUT CUT CUT ## / ## CUT CUT CUT ## / ## CUT CUT CUT ## / ## CUT CUT CUT ##" at 2089.75,3199.65 h60 r270